# Altium PCB LED.PcbDoc
Units mm, origin at the board's own origin, x right, y up, seen from the top; angles counter-clockwise.
Board outline 17.8 x 20 mm, 2 copper layers (Top Layer, Bottom Layer), stack 1.671 mm thick; 3 components, 3 nets, 6 pads, 1 vias.
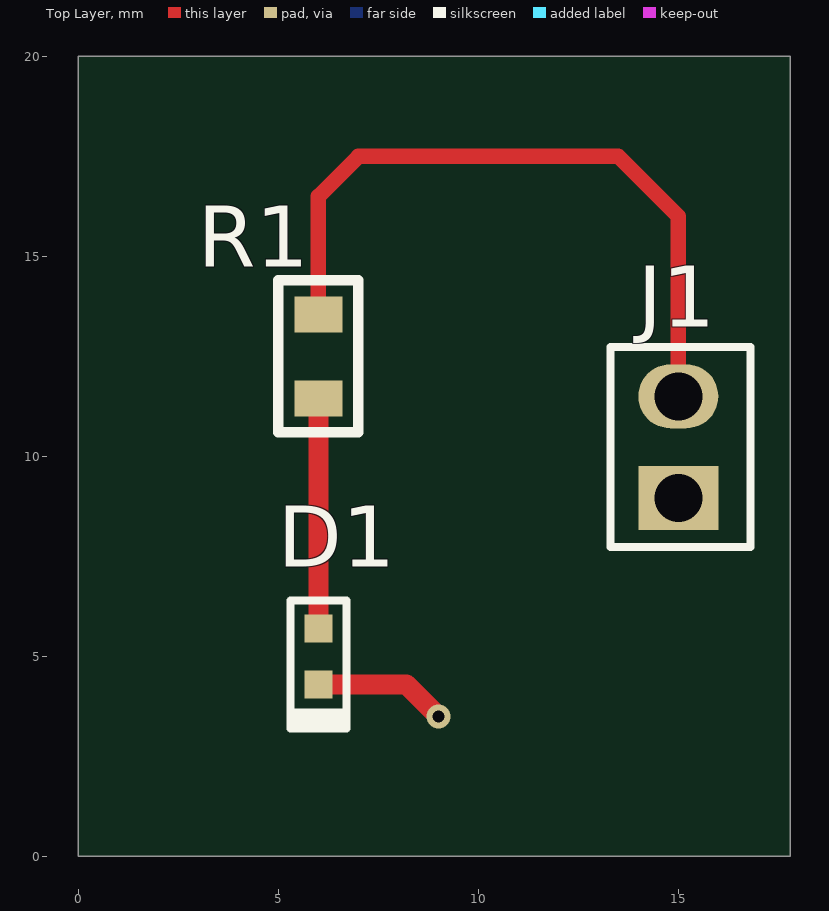
[diagram p0: Top Layer view]
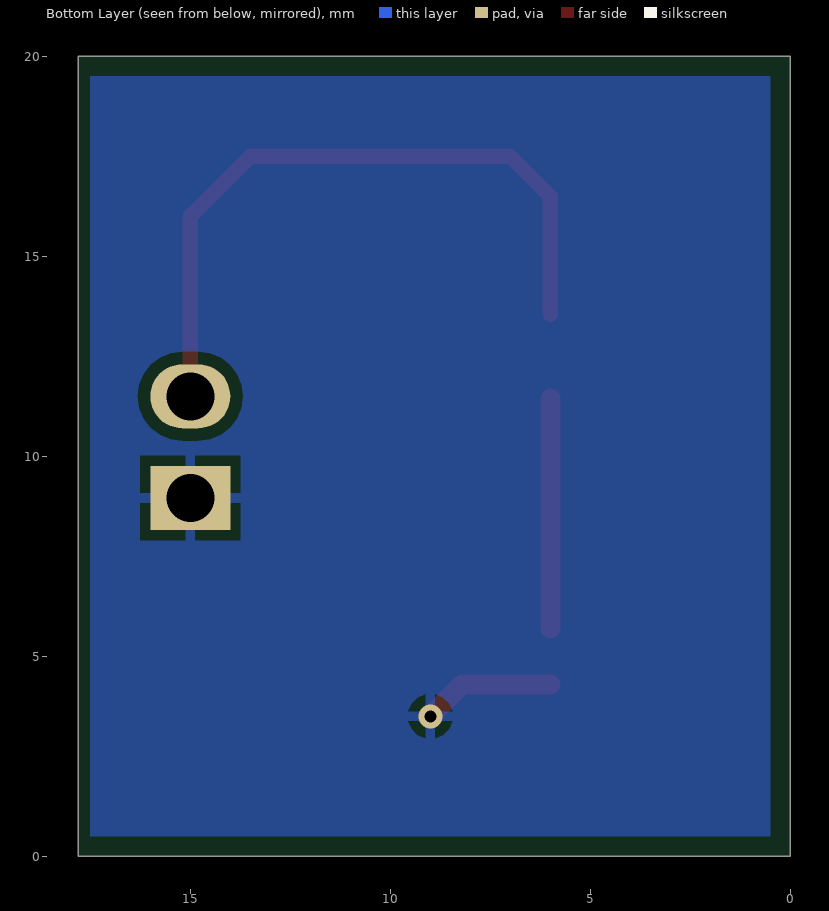
[diagram p1: Bottom Layer view, seen from below]

## Layer stack, top to bottom
Top Solder: solder mask 0.0102, Solder Resist, Dk 3.5
Top Layer: signal copper 0.0356
Dielectric 1: dielectric 1.6, FR-4, Dk 4.8
Bottom Layer: signal copper 0.0356
Bottom Solder: solder mask 0.0102, Solder Resist, Dk 3.5

## Board outline
0,0 17.8,0 17.8,20 0,20

## Design rules (kind name [scope] priority, off if disabled: settings)
Clearance [All] p1: gap=0.3 ignorepadtopadclearanceinfootprint=FALSE
PolygonConnect [All] p1: connectstyle=Relief reliefconductorwidth=0.254 reliefentries=4 polygonreliefangle="90 Angle" airgapwidth=0.254
RoutingVias [All] p1: holewidth=0.3 width=0.6 viastyle="Through Hole" minholewidth=0.3 minwidth=0.6 maxholewidth=0.3 maxwidth=0.6
SilkToSolderMaskClearance [IsPad] p1: minsilkscreentomaskgap=0.1 clearancetoexposedcopper=TRUE
SolderMaskExpansion [All] p1: expansion=0.102 istentingtop=FALSE
Width [All] p1: maxlimit=1 minlimit=0.3 preferedwidth=0.5
29 further rules are at their usual default settings.

## Components (designator, comment, footprint, x,y, rotation, side; value= is the part's Value field where it differs from the comment)
D1 "GREEN" LED0603GREEN 6,5 r90 top
J1 "1x2 Header" HEADER1x2 15,8.96 r180 top
R1 "360R" R0805 6,12.5 r90 top

## Footprints (in the part's own frame and the unit in brackets; to place one, negate y for a bottom-side part, rotate by r counter-clockwise, add the part's x,y. Pads: shape width x height; smd on the part's side, far side on the other; paste and mask are expansions set on the pad)
HEADER1x2 [mm]
  rect 2x1.6 hole 1.2: 1(0,0)
  oval 2x1.6 hole 1.2: 2(0,-2.54)
  silkscreen extent -1.8,-3.77 1.7,1.23
LED0603GREEN [mm]
  rect 0.7x0.7 smd: 1(-0.7,0) 2(0.7,0)
  silkscreen extent -1.8,-0.7 1.4,0.7, body extent -0.8,-0.4 0.8,0.4, height 0.59
R0805 [mm]
  rect 0.9x1.2 smd: 1(-1.05,0) 2(1.05,0)
  silkscreen extent -1.9,-1 1.9,1, body extent -1,-0.63 1,0.63, height 0.61

## Part data
D1: library part LSM0603453V, "LED Uni-Color Green 571nm 2-Pin Chip 0603(1608Metric) T/R", Case Code (Imperial)=0603, Case Code (Metric)=1608, Color=Green, Forward Voltage=2V, Lens Color=Colorless, Manufacturer="Visual Communications", Supplier Part Number 1=LSM0603453VCT-ND, Test Current=20mA, Case/Package=0603, Category=LEDs, ComponentLink1Description=http://www.farnell.com/datasheets/2699708.pdf?src-supplier=Farnell, ComponentLink1URL=http://www.farnell.com/datasheets/2699708.pdf?src-supplier=Farnell, ComponentLink2Description=http://www.farnell.com/datasheets/2699708.pdf?src-supplier=Newark, ComponentLink2URL=http://www.farnell.com/datasheets/2699708.pdf?src-supplier=Newark, ComponentLink3Description=https://vcclite.com/wp-content/uploads/wpallimport/files/files/LSM0603453V.pdf?src-supplier=Digi-Key, ComponentLink3URL=https://vcclite.com/wp-content/uploads/wpallimport/files/files/LSM0603453V.pdf?src-supplier=Digi-Key, Dominant Wavelength=572nm, Height=0.65mm, Length=1.6mm, Lens Size=0.8mm, Lens Style=Flat, Lens Transparency=Clear, Luminous Intensity=63mcd, Manufacturer Part Number=LSM0603453V, Mount="Surface Mount", Packaging="Cut Tape", Pricing 1="1=0.40000, 10=0.24700, 100=0.14210, 1000=0.11124, 2000=0.10197 (USD)", RoHS=Yes, RoHS Compliant=Yes, Stock 1=90796, Supplier 1=Digi-Key, Viewing Angle=120°, Width=0.8mm
J1: library part 61300211121, "CONN HEADER 2 POS 2.54", Color=Black, Current Rating=3A, Manufacturer="Wurth Electronics", Max Operating Temperature=125°C, Min Operating Temperature=-40°C, Supplier Part Number 1=732-5315-ND, Voltage Rating=250V, Category="Headers and Wire Housings", ComponentLink1Description=https://datasheet.ciiva.com/13619/6130xx11121-48870-13619345.pdf?src-supplier=Mouser, ComponentLink1URL=https://datasheet.ciiva.com/13619/6130xx11121-48870-13619345.pdf?src-supplier=Mouser, Connector Type="Male Pin", Contact Gender=Male, Contact Material="Copper Alloy,Copper", Contact Mating Length=0.236inch, Contact Plating=Gold, Contact Type="Male Pin", Gender=Male, Housing Material=PBT, Lead Free="Lead Free", Manufacturer Part Number=61300211121, Mount="Through Hole", Number of Contacts=2, Number of Positions=2, Number of Rows=1, Packaging=Bulk, Pitch=0.1inch, Pricing 1="1=0.13000, 10=0.11300, 25=0.09400, 50=0.07900, 100=0.07100, 1000=0.06500 (USD)", RoHS=Yes, RoHS Compliant=Yes, Series=WR-PHD, Stock 1=164929, Supplier 1=Digi-Key, Termination="Through Hole"
R1: library part RC0805FR-07360RL, "Res Thick Film 0805 360 Ohm 1% 0.125W(1/8W) ±100ppm/C Pad SMD T/R", Case Code (Imperial)=0805, Case Code (Metric)=2012, Manufacturer=Yageo, Max Operating Temperature=155°C, Max Power Dissipation=125mW, Min Operating Temperature=-55°C, Supplier Part Number 1=1029238, Temperature Coefficient=100ppm/°C, Tolerance=1%, Voltage Rating=150V, Case/Package=0805, Category="Chip SMD Resistors", ComponentLink1Description=https://datasheet.ciiva.com/11808/0900766b8106beab-11808261.pdf?src-supplier=Rs, ComponentLink1URL=https://datasheet.ciiva.com/11808/0900766b8106beab-11808261.pdf?src-supplier=Rs, ComponentLink2Description=https://datasheet.ciiva.com/17423/rc0805-17423149.pdf?src-supplier=Future+Electronics, ComponentLink2URL=https://datasheet.ciiva.com/17423/rc0805-17423149.pdf?src-supplier=Future+Electronics, ComponentLink3Description=https://datasheet.ciiva.com/12667/rc0805-12667401.pdf?src-supplier=Mouser, ComponentLink3URL=https://datasheet.ciiva.com/12667/rc0805-12667401.pdf?src-supplier=Mouser, Depth=1.25mm, Features="Moisture Resistant", Height=0.5mm, Lead Free="Lead Free", Length=2mm, Manufacturer Part Number=RC0805FR-07360RL, Mount="Surface Mount", Number of Terminations=2, Packaging="Tape and Reel", Power Rating=125mW, Pricing 1="5000=0.00270, 25000=0.00250, 125000=0.00230, 375000=0.00220, 1000000=0.00210 (USD)", Resistance=360R, RoHS=Yes, RoHS Compliant=Yes, Series=RC, Size Code=0805, Stock 1=40000, Supplier 1="Future Electronics", Technology="THICK FILM", Termination=SMD/SMT, Voltage Rating (DC)=150V

## Via types
v1: diameter 0.6, hole 0.3, Top Layer to Bottom Layer, tented both sides, 1 vias

## Nets (pads, with @x,y where several pads share a name; then routed paths per layer and width w, separated by ;. In a path a pad name is that pad's centre, name@x,y a point inside that pad or via, vN(x,y) a via of type N, cw(c..) or ccw(c..) an arc to the next point about the centre after c; other vN are vias at no path point)
3V3: J1.2 R1.2 | length 17.5
  Top Layer w0.381: R1.2 6,16.5 7,17.5 13.5,17.5 15,16 J1.2
DIODE1: D1.2 R1.1 | length 5.7
  Top Layer w0.5: D1.2 R1.1
GND: D1.1 J1.1 | length 3.3
  Top Layer w0.5: D1.1 8.2,4.3 v1(9,3.5)

## Polygon pours and split planes (outlines as drawn)
GND on Bottom Layer "GND_L02_P000" (solid, pour order 0): 0.5,0.5 17.5,0.5 17.5,19.5 0.5,19.5